# Altium PCB LimeSDR-Micro_mPCIe_1v4.PcbDoc (part 8 of 11)
Units mm, origin at the board's own origin, x right, y up, seen from the top; angles counter-clockwise.
Board outline 50.8 x 29.7 mm, 8 copper layers (Top, L2, L3, L4, L5, L6, L7, Bottom), stack 0.925 mm thick; 664 components, 386 nets, 2358 pads, 843 vias.
Unrouted connection lines stored in the file: 28.
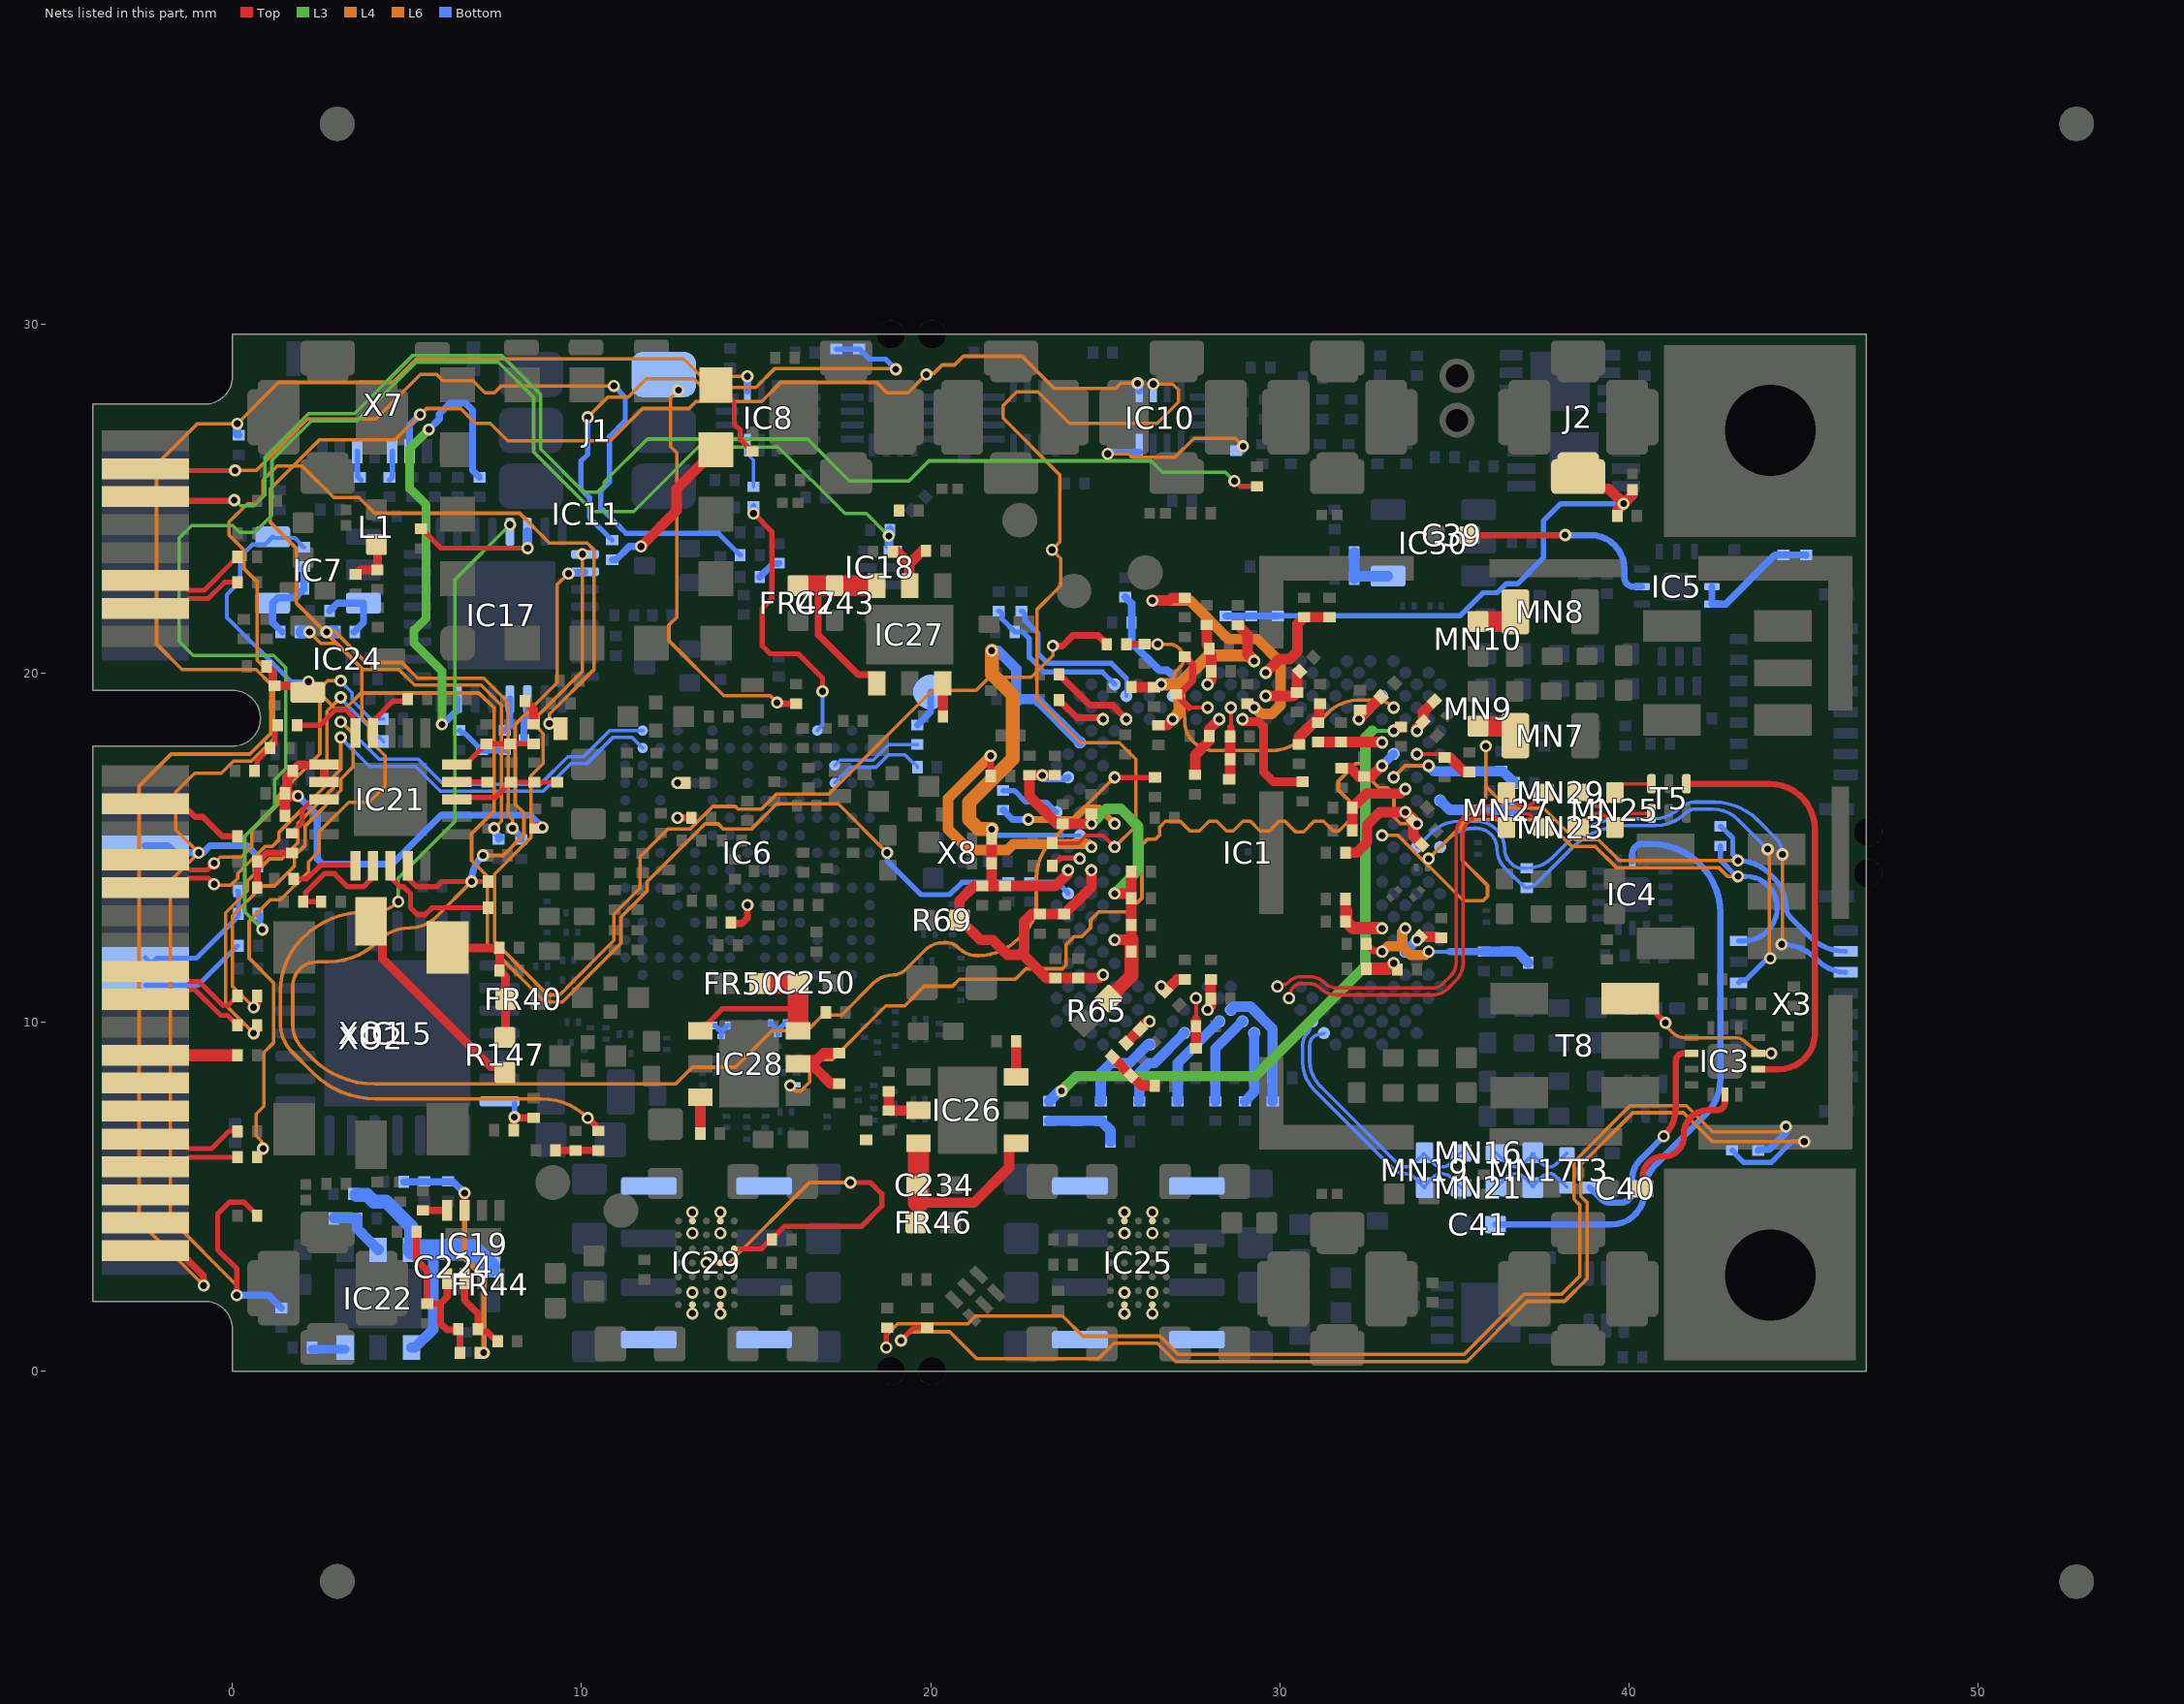
[diagram p12: the nets of this part, all layers, seen from the top]

## Via types
v1: diameter 0.35, hole 0.2, Top to Bottom, tented both sides, 684 vias
v2: diameter 0.35, hole 0.2, L5 to Bottom, tented both sides, 117 vias
v3: diameter 0.4, hole 0.2, Top to Bottom, tented both sides, 30 vias
v4: diameter 0.5, hole 0.2, Top to Bottom, tented both sides, 12 vias

## Nets (pads, with @x,y where several pads share a name; then routed paths per layer and width w, separated by ;. In a path a pad name is that pad's centre, name@x,y a point inside that pad or via, vN(x,y) a via of type N, cw(c..) or ccw(c..) an arc to the next point about the centre after c; other vN are vias at no path point) (continued)
LMS_TX1_BB_Q_P: IC1.R3 R14.1 | length 27.3
  L6 w0.1: v2(15.977,8.183) 16.135,8.025 16.279,8.025 16.534,8.28 16.534,8.739 16.72,8.925 17.179,8.925 18.714,10.46 19.251,10.46 19.525,10.734 ; 19.525,10.735 19.715,10.925 19.816,11.025 20.625,11.025 20.825,11.225 22.425,11.225 22.725,11.525 23.775,11.525 23.875,11.625 23.875,12.217 24.109,12.452 24.329,12.452 24.578,12.701 24.578,12.921 24.813,13.155 25.652,13.155 25.747,13.25 26.05,13.553 26.05,15.075 26.219,15.244 26.444,15.244 26.556,15.356 26.556,15.581 26.725,15.75 27.149,15.75 27.424,15.475 27.7,15.475 27.975,15.75 28.2,15.75 28.475,15.475 28.671,15.475 28.946,15.75 29.159,15.75 29.434,15.475 29.705,15.475 29.98,15.75 30.149,15.75 30.45,15.45 ; 30.45,15.45 30.68,15.45 30.98,15.75 31.25,15.75 31.525,15.475 31.692,15.475 32.159,15.941 32.159,16.166 31.675,16.65 31.675,16.9 32.175,17.4 32.4,17.4 32.575,17.225 32.575,16.975 32.84,16.71 33.09,16.71 33.271,16.529 33.271,15.876 33.461,15.686 33.921,15.686 v2(33.929,15.678)
LMS_TX2_BB_I_N: IC1.T6 R6.1 X3.3 | length 23.6
  L4 w0.1: v1(32.93,15.345) 33.389,15.345 35.259,13.475 35.825,13.475 35.95,13.6 35.95,13.915 35.225,14.64 35.225,15.75 35.9,16.425 v1(35.9,17.9)
  L6 w0.1: v1(35.9,17.9) 35.9,16.75 36.525,16.125 37.558,16.125 38.458,15.225 39.125,15.225 39.725,14.625 v2(43.125,14.625) v2@43.15,14.625
  Bottom w0.15: R6.1@42.625,15.605 42.7,15.53 42.712,15.53 42.975,15.267 42.975,15.2 42.975,14.813 43.125,14.663 v2(43.125,14.625) cw(c43.125,13.358) 44.021,14.254 44.182,14.093 cw(c43.414,13.325) 44.5,13.325 ccw(c44.983,13.325) 44.642,12.983 45.17,12.455 ccw(c46.207,13.492) X3.3@46.207,12.025
LMS_TX2_BB_I_P: IC1.V2 R6.2 X3.2 | length 14.4
  L6 w0.1: v2(34.262,14.679) 35.382,15.8 37.6,15.8 38.375,15.025 39.042,15.025 39.642,14.425 42.575,14.425 42.825,14.175 v2(43.125,14.175)
  Bottom w0.15: R6.2@42.625,15.045 42.625,14.63 43.08,14.175 v2(43.125,14.175) 43.35,14.175 cw(c43.35,13.275) 44.25,13.275 cw(c43.3,13.275) 43.3,12.325 X3.2@43.142,12.325
LMS_TX2_BB_Q_N: IC1.U1 R9.2 X3.6 | length 16
  L6 w0.1: v2@44.025,14.95 44.025,11.85 v2(44.05,11.825)
  Bottom w0.1: IC1.U1@34.595,15.012 34.82,15.237 cw(c35.575,14.482) 35.575,15.55 35.63,15.55 cw(c35.63,14.961) 36.046,15.378 36.049,15.374 cw(c35.625,14.95) 36.225,14.95 ccw(c36.97,14.95) 36.443,14.424 ccw(c36.97,14.95) 36.444,14.423 36.634,14.233 36.921,13.945 36.95,13.945 36.984,13.911 36.984,13.883 ccw(c37.075,13.974) 37.029,13.853 ccw(c37.068,14.323) 37.068,13.852 ccw(c37.068,14.253) 37.352,13.969 38.38,14.998 cw(c39.895,13.483) 38.4,15.017 cw(c39.895,13.483) 39.895,15.625 40.766,15.625 ccw(c40.766,16.809) 41.603,15.972 cw(c41.912,15.663) 41.912,16.1 42.4,16.1 cw(c42.4,15.074) 43.126,15.799 v2(43.975,14.95)
  Bottom w0.15: X3.6@43.142,11.125 43.217,11.2 43.35,11.2 43.922,11.772 cw(c44.05,11.644) v2(44.05,11.825)
LMS_TX2_BB_Q_P: IC1.U3 R9.1 X3.5 | length 17.3
  L6 w0.1: v2@44.4,12.225 v2(44.4,14.8)
  Bottom w0.1: IC1.U3@33.929,15.012 34.325,15.408 cw(c35.15,14.583) 35.15,15.75 35.641,15.75 cw(c35.641,14.95) 36.441,14.95 ccw(c36.964,14.95) 36.595,14.58 36.65,14.525 ccw(c36.94,14.815) 36.94,14.405 R9.1@37.075,14.405 ccw(c37.075,15.443) 37.809,14.709 38.298,15.198 cw(c39.812,13.683) 39.812,15.825 40.726,15.825 ccw(c40.726,16.849) 41.45,16.125 cw(c41.872,15.703) 41.872,16.3 42.436,16.3 cw(c42.436,14.516) 43.697,15.778 44.234,15.241 cw(c43.892,14.9) v2@44.375,14.9
  Bottom w0.15: v2(44.376,12.225) cw(c44.376,10.84) 45.356,11.819 45.427,11.748 ccw(c46.207,12.529) X3.5@46.207,11.425
LMS_TXEN: IC1.U29 IC10.10 R11.1 | length 24.9
  Top w0.11: R11.1@23.48,15.15 R11.1@23.48,15.125 24.225,15.125 24.448,15.348 24.934,15.348 v1(25.27,15.012)
  L4 w0.1: v1(23.475,23.525) 23.725,23.275 23.725,22.5 23.05,21.825 23.05,19.25 24.299,18.001 25.405,18.001 25.875,17.531 25.875,15.617 v1(25.27,15.012)
  L6 w0.1: v1(23.475,23.525) 23.7,23.75 23.7,25.675 22.075,27.3 22.075,27.66 22.465,28.05 23.075,28.05 23.975,27.15 26.485,27.15 27.1,27.765 27.1,28.109 26.934,28.275 v2(26.375,28.275)
LMS_TxPLL_CLK: C196.2 IC1.E5 R149.2 | length 10.9
  Top w0.2: R149.2@25.57,20.825 v1(26.505,20.825)
  L6 w0.1: v1@26.53,20.825 26.825,20.825 cw(c26.825,20.4) 27.034,20.77 cw(c26.825,20.4) 27.25,20.4 cw(c26.948,20.4) 27.162,20.187 27.063,20.088 ccw(c27.35,19.8) 26.943,19.8 26.943,19.503 ccw(c27.478,19.503) 27.1,19.125 cw(c26.678,18.703) 27.275,18.703 27.275,18.625 ccw(c28.125,18.625) 28.125,17.775 29.75,17.775 ccw(c29.75,19.103) 30.689,18.164 31.396,18.871 cw(c32.25,18.018) 31.561,19.009 cw(c32.25,18.018) 32.25,19.225 32.739,19.225 cw(c32.739,18.484) v1(33.263,19.008)
LNA2_EN: IC10.9 R144.1 X7.6 | length 52.3
  L4 w0.1: v1(0.875,6.375) 0.828,6.422 0.828,6.588 0.675,6.74 0.675,7.365 0.9,7.59 0.9,9.13 1.173,9.403 1.173,11.132 0.475,11.83 0.475,12.888 1.087,13.5 1.375,13.5 2.175,14.3 2.175,14.588 2.475,14.888 2.475,15.444 3.328,16.297 3.912,16.297 4.375,16.759 4.375,17.626 3.9,18.101 3.9,18.525 3.7,18.725 3.7,20.134 1.825,22.009 1.825,23.575 1.075,24.325 1.075,25.267 2.483,26.675 4.65,26.675 v1(5.375,27.4) 5.384,27.4 5.559,27.575 6.535,27.575 6.96,27.15 7.385,27.15 7.885,26.65 10.817,26.65 11.742,27.575 13.075,27.575 13.275,27.775 15.158,27.775 15.708,28.325 18.45,28.325 18.75,28.025 19.35,28.025 v1(19.875,28.55)
  L6 w0.1: v1(19.875,28.55) 19.914,28.589 20.096,28.589 20.333,28.825 20.681,28.825 20.931,29.075 22.615,29.075 23.54,28.15 25.3,28.15 25.45,28.3 v2(25.925,28.3)
  Bottom w0.2: X7.6@5.075,26.35 5.075,27.1 v1(5.375,27.4) ; v2(25.925,28.3) 25.973,28.252 25.975,28.252 IC10.9@25.975,28.075
LNA2_EN_LS: IC10.4 R131.2 | length 5.2
  L6 w0.1: v2(25.075,26.275) 25.675,26.275 25.775,26.175 26.992,26.175 27.542,26.725 28.72,26.725 v2(28.95,26.495)
  Bottom w0.2: v2(25.075,26.275) 25.116,26.275 25.166,26.325 IC10.4@25.975,26.325
MCP_RESET: C178.1 IC15.14 R130.2 | length 1.3
  Top w0.2: R130.2@8.028,6.927 R130.2@8.055,6.9 ; v1@8.03,7.255 C178.1@8.625,7.255 ; R130.2@8.053,6.927 v1@8.053,7.198
  Bottom w0.15: v1@8.075,7.255 IC15.14@8.075,7.675
  other v1: 8.075,7.275
NetC7_2: C7.2 IC1.C29 R20.1 | length 4.6
  Bottom w0.15: R20.1@21.95,21.77 21.975,21.77 22.05,21.695 22.05,21.542 22.405,21.187 C7.2@22.405,21.175 22.63,21.175 22.825,20.98 22.825,20.45 23.25,20.025 24.92,20.025 IC1.C29@25.27,19.674
NetC39_2: C39.2 IC5.2 | length 5.9
  Top w0.18: C39.2@35.425,23.95 v1(38.175,23.95)
  Bottom w0.18: v1(38.175,23.95) 38.897,23.95 cw(c38.897,22.972) 39.875,22.972 39.875,22.725 ccw(c40.125,22.725) 40.125,22.475 IC5.2@40.375,22.475
NetC40_2: C40.2 IC3.13 | length 4.2
  Top w0.18: C40.2@40.4,5.225 40.4,5.575 cw(c40.975,5.575) 40.975,6.15 41,6.15 ccw(c41,6.725) 41.575,6.725 41.575,6.787 cw(c42.262,6.787) 42.262,7.475 42.538,7.475 ccw(c42.538,7.687) 42.75,7.687 IC3.13@42.75,7.922
NetC41_2: C41.2 IC4.13 | length 17.6
  Bottom w0.18: C41.2@36.177,4.2 39.5,4.2 ccw(c39.5,5.15) 40.392,4.822 ccw(c39.5,5.15) 40.45,5.15 cw(c41.536,5.15) 40.768,5.918 42.2,7.35 ccw(c41.176,8.375) 42.625,8.375 42.625,13.11 ccw(c40.635,13.11) 40.635,15.1 40.375,15.1 ccw(c40.375,14.825) 40.1,14.825 IC4.13@40.1,14.603
NetC43_1: C43.1 FR1.2 IC5.8 IC5.9 | length 3.8
  Bottom w0.2: IC5.8@42.375,22.475 IC5.9@42.375,21.975 42.775,21.975 44.18,23.38 C43.1@44.425,23.38 45.065,23.38 FR1.2@45.07,23.375
NetC50_1: C50.1 C51.1 C57.1 C58.1 C59.1 C60.1 C61.1 C62.1 IC1.AA29 IC1.AE29 IC1.L33 IC1.R31 R65.2 | length 13.2
  Top w0.3: C58.1@23.564,17.069 C57.1@22.83,17.069 22.83,16.468 23.62,15.678 v1(24.604,15.678) C50.1@24.604,15.97 ; v1(25.27,13.68) 25.747,13.68 C61.1@25.747,14.31 ; v1@25.299,12.338 25.294,12.338 25.28,12.352 25.28,12.358 25.747,12.358 C59.1@25.747,12.785 C62.1@25.747,13.54
  Top w0.4: R65.2@25.1,10.675 25.747,11.322 C60.1@25.747,12.015 25.747,12.358
  L3 w0.3: v1(24.604,15.678) 25.029,16.103 25.447,16.103 25.942,15.607 25.942,14.352 v1(25.27,13.68)
  Bottom w0.2: v1(23.197,17.065) 23.294,16.968 23.79,16.968 23.804,16.981 23.91,16.981 IC1.L33@23.938,17.01
  other v1: 25.27,12.348
NetC52_1: C52.1 C53.1 C54.1 FR6.1 IC1.A17 IC1.C25 IC1.F24 | length 6.8
  Top w0.3: FR6.1@25.752,19.595 C54.1@26.397,19.595 26.51,19.595 26.589,19.674 v1(26.602,19.674) ; C52.1@26.524,18.501 26.774,18.501 26.935,18.662 v1(26.935,18.675) ; C53.1@28.8,21.375 29.075,21.1 29.075,20.532 v1(29.266,20.34)
  L4 w0.35: v1(26.602,19.674) 27.125,19.674 ; v1(26.935,18.675) 27.125,18.865 27.125,19.674 ; v1(29.266,20.34) 29.107,20.5 27.951,20.5 27.125,19.674
NetC55_2: C55.2 FR5.1 IC1.M4 | length 2.4
  Top w0.3: C55.2@32.081,15.49 32.081,15.515 32.077,15.519 FR5.1@32.077,16.14 32.482,16.545 33.45,16.545 33.582,16.677 v1(33.596,16.677)
NetC56_1: C56.1 FR4.1 IC1.AL21 | length 0.9
  Top w0.3: v1(27.934,10.35) 27.934,10.364 28.026,10.456 C56.1@28.026,10.675 FR4.1@28.025,11.22 FR4.1@28.025,11.22
NetC63_1: C63.1 IC1.G5 R66.1 | length 18.3
  Top w0.3: v1(33.263,18.342) 33.276,18.342 33.389,18.455 C63.1@33.475,18.455
  L3 w0.11: 32.658,18.342 v1@33.182,18.342
  L3 w0.3: v1(23.75,8.025) 24.175,8.45 29.3,8.45 32.45,11.6 32.45,18.15 32.65,18.35
  Bottom w0.3: R66.1@23.4,7.731 23.694,8.025 v1(23.75,8.025)
NetC64_1: C64.1 FR9.1 FR51.1 IC1.P4 | length 3.6
  Top w0.3: FR51.1@31.88,14.85 32.2,14.85 32.5,15.15 32.5,15.65 32.861,16.011 v1(33.596,16.011) ; C64.1@33.824,15.742 33.824,15.33 FR9.1@34.077,15.077
  Top w0.35: v1(33.596,16.011) 33.824,15.782 C64.1@33.824,15.742
NetC65_1: C65.1 FR20.1 IC1.D6 IC1.F8 | length 1.8
  Top w0.3: v1(32.264,18.675) 32.264,18.681 FR20.1@32.899,19.317
  Bottom w0.3: v1(32.264,18.675) IC1.D6@32.93,19.341
NetC66_1: C66.1 FR19.1 IC1.B16 | length 2.9
  Top w0.3: v1(29.599,20.007) 29.992,20.4 30.288,20.4 30.509,20.621 30.509,21.404 C66.1@30.7,21.595 FR19.1@31.425,21.595
NetC67_1: C67.1 C68.1 FR18.1 IC1.E19 | length 2
  Top w0.11: 28.6,18.45 v1(28.6,19.008)
  Top w0.2: C67.1@28.6,18.155 28.6,18.18 28.6,18.45
  Top w0.3: FR18.1@28.575,17.055 28.575,17.628 C67.1@28.575,18.155
NetC69_2: C69.2 FR17.1 IC1.F20 | length 1.9
  Top w0.3: FR17.1@27.575,17.085 27.575,17.65 27.98,18.055 27.98,18.225 27.98,18.388 v1(28.267,18.675)
NetC70_1: C70.1 FR16.1 IC1.AJ25 | length 0.7
  Top w0.3: C70.1@26.724,10.888 27.056,11.22 FR16.1@27.275,11.22
  other v1: 26.602,11.016
NetC71_1: C71.1 IC1.AP26 R67.1 | length 2.5
  Bottom w0.3: R67.1@24.875,7.73 C71.1@24.875,8.4 24.875,8.539 25.161,8.825 25.696,8.825 26.212,9.341 26.26,9.341 IC1.AP26@26.269,9.351
NetC72_1: C72.1 FR14.1 IC1.AN23 | length 2.6
  Bottom w0.3: FR14.1@25.97,7.73 25.975,7.73 C72.1@25.975,8.4 25.975,8.539 26.261,8.825 26.409,8.825 IC1.AN23@27.268,9.684
NetC73_1: C73.1 FR13.1 IC1.AM20 | length 2.8
  Bottom w0.3: FR13.1@27.075,7.73 C73.1@27.075,8.4 27.075,8.825 IC1.AM20@28.267,10.017
NetC74_1: C74.1 FR12.1 IC1.AL19 | length 3.6
  Bottom w0.3: IC1.AL19@28.6,10.35 28.614,10.35 28.706,10.442 29.158,10.442 29.795,9.805 C74.1@29.795,8.4 FR12.1@29.795,7.73
NetC75_1: C75.1 FR11.1 IC1.AG5 | length 0.8
  Top w0.35: FR11.1@32.53,11.525 33.105,11.525 v1(33.263,11.682)
NetC76_2: C76.2 FR10.1 IC1.AD6 | length 2.1
  Top w0.3: FR10.1@31.88,12.875 C76.2@31.88,13.525
  Top w0.35: 31.905,13.2 31.905,12.875 32.09,12.69 32.921,12.69 v1(32.93,12.681)
NetC77_1: C77.1 FR8.1 IC1.J3 | length 1.6
  Top w0.11: v1(33.929,17.676) 34.629,17.676 C77.1@34.63,17.675
  Top w0.3: C77.1@34.725,17.58 34.87,17.58 35.285,17.165 FR8.1@35.428,17.165
NetC78_2: C78.2 FR7.1 IC1.J5 IC1.K6 | length 1.9
  Top w0.3: FR7.1@31.772,17.27 32.03,17.27 32.265,17.035 C78.2@32.422,17.035 32.621,17.035 v1(32.93,17.343)
  Bottom w0.25: v1(32.93,17.343) IC1.J5@33.263,17.676
NetC79_2: C79.2 FR15.1 R66.2 R67.2 | length 2.2
  Bottom w0.3: R66.2@23.4,7.171 R66.2@23.425,7.171 ; R66.2@23.426,7.17 C79.2@24.175,7.17 R67.2@24.875,7.17 24.9,7.17 24.9,7.145 25.145,6.9 FR15.1@25.145,6.575
NetC80_1: C80.1 FR21.1 IC1.K2 IC1.L5 | length 3.8
  L4 w0.11: v1(33.263,17.01) 33.596,17.343 v1(34.262,17.343)
  Bottom w0.3: v1(34.262,17.343) 34.422,17.183 36.387,17.183 FR21.1@36.725,16.845
NetC81_1: C81.1 C82.1 FR24.1 IC1.C21 | length 1.8
  Top w0.3: FR24.1@27.909,21.375 27.909,20.8 27.984,20.725 C82.1@27.984,20.7 27.984,20.587 28.034,20.537 C81.1@28.034,20.05 28.034,19.788 27.934,19.688 v1(27.934,19.674)
NetC83_1: C83.1 C84.1 C85.1 FR23.1 IC1.AD4 IC1.AF2 IC1.AF6 | length 5.7
  Top w0.2: C83.1@32.477,12.24 32.477,12.215 32.527,12.165 32.552,12.165 32.68,12.037 32.907,12.037 v1(32.93,12.015) ; v1@34.233,11.986 v1(34.262,12.015)
  L4 w0.3: v1(32.93,12.015) 32.943,12.015 33.1,12.172 33.504,12.172 ; v1(33.596,12.681) 33.596,12.667 33.504,12.575 33.504,12.172 ; v1(34.262,12.015) 34.248,12.015 34.156,11.923 33.752,11.923 33.504,12.172
  Bottom w0.11: v1(34.262,12.015) 34.866,12.015
  Bottom w0.2: 34.866,12.015 C84.1@35.845,12.015
  Bottom w0.3: C84.1@35.845,12.015 C85.1@36.495,12.015 36.805,12.015 FR23.1@37.12,11.7
NetC86_1: C86.1 FR22.1 IC1.AN17 | length 2.1
  Bottom w0.3: FR22.1@29,7.73 29.266,7.996 C86.1@29.266,8.4 IC1.AN17@29.266,9.684
NetC87_1: C87.1 IC1.D24 R68.1 | length 3.5
  Bottom w0.11: IC1.D24@26.935,19.341 26.935,19.915
  Bottom w0.22: R68.1@25.575,22.17 25.755,21.99 C87.1@25.755,21.45 25.755,20.87 26.55,20.075 26.775,20.075 26.935,19.915
NetC88_1: C88.1 C89.1 C90.1 C91.1 C92.1 C93.1 C94.1 C95.1 C96.1 C97.1 IC1.AH30 IC1.H32 IC1.T32 IC1.W31 IC1.W33 R69.2 | length 27.5
  Top w0.3: R69.2@20.825,12.925 R69.2@20.825,12.95 ; v1@21.746,15.525 C92.1@21.746,15.258 C93.1@21.746,14.541 21.746,13.9 ; v1(23.938,14.346) 23.929,14.336 23.929,14.245 23.584,13.9 C94.1@22.13,13.9 21.746,13.9 ; v1(24.604,14.346) 24.604,13.87 C88.1@23.825,13.091 C89.1@23.125,13.091 22.891,13.091 22.675,12.875 22.675,12.05 22.55,11.925 ; v1(24.937,11.349) 24.924,11.349 24.832,11.257 C97.1@24.225,11.257 C96.1@23.575,11.257 23.318,11.257 22.65,11.925 22.55,11.925 ; R69.2@20.825,12.95 21.426,12.349 21.776,12.349 22.2,11.925 22.55,11.925 ; R69.2@20.825,12.95 20.825,13.475 21.25,13.9 C95.1@21.475,13.9 21.746,13.9
  L4 w0.4: v1(21.75,15.525) 21.375,15.525 21.1,15.8 21.1,16.297 22.35,17.547 22.35,19.375 21.75,19.975 v1(21.75,20.639)
  Bottom w0.11: 23.767,15.345 IC1.T32@24.271,15.345
  Bottom w0.15: v1(21.75,15.525) 21.93,15.345 23.767,15.345
  Bottom w0.3: v1(21.75,20.639) 21.93,20.639 22.45,20.119 C91.1@22.45,20 C90.1@22.45,19.25 23.031,19.25 IC1.H32@24.271,18.009
NetC98_1: C98.1 FR25.1 IC1.G3 | length 1.1
  Top w0.3: v1(33.929,18.342) 33.938,18.352 33.938,18.434 34.12,18.616 34.106,18.629 34.106,18.877 FR25.1@34.427,19.198
NetC99_1: C99.1 FR32.1 IC1.E21 | length 2.5
  Top w0.11: 27.404,19.008 v1(27.934,19.008)
  Top w0.2: FR32.1@27.275,20.47 27.5,20.245 27.5,19.77 27.17,19.44 27.075,19.44 C99.1@27.025,19.39 27.05,19.39 27.1,19.34 27.1,19.312 27.404,19.008
  Top w0.25: v1@27.915,19.027 v1(27.934,19.008)
NetC100_1: C100.1 FR31.1 IC1.D16 | length 1.6
  Top w0.3: v1(29.599,19.341) 30.395,19.341 C100.1@30.495,19.441 30.495,19.975 FR31.1@30.57,20.05
NetC101_1: C101.1 FR30.1 IC1.E17 | length 7.8
  Top w0.3: v1(26.35,22.075) 26.825,22.075 26.905,22.155 FR30.1@27.275,22.155 ; C101.1@29.075,19.12 29.15,19.12 29.262,19.008 v1(29.266,19.008)
  L4 w0.3: v1(26.35,22.075) 27.425,22.075 28.525,20.975 29.35,20.975 30.025,20.3 30.025,19.075 29.775,18.825 29.463,18.825 29.28,19.008 v1(29.266,19.008)
NetC102_1: C102.1 FR29.1 IC1.AK22 | length 1.4
  Top w0.11: 27.601,10.124 v1(27.601,10.683)
  Top w0.2: C102.1@27.601,9.875 27.601,10.124
  Top w0.3: FR29.1@27.601,9.25 C102.1@27.601,9.875
NetC103_1: C103.1 FR28.1 IC1.AM18 | length 2.6
  Bottom w0.3: FR28.1@28.155,7.73 C103.1@28.155,8.4 28.155,9.239 IC1.AM18@28.933,10.017
NetC104_1: C104.1 FR27.2 IC1.AE3 IC1.AF4 | length 1.1
  Top w0.3: C104.1@34.021,12.446 34.039,12.428 34.05,12.44 34.487,12.44 34.512,12.415 FR27.2@34.625,12.415
  Bottom w0.3: IC1.AF4@33.596,12.015 v1(33.929,12.348)
NetC105_1: C105.1 FR26.2 IC1.N1 | length 2.3
  Bottom w0.3: IC1.N1@34.595,16.344 34.864,16.075 C105.1@36,16.075 FR26.2@36.745,16.075
NetC106_1: C106.1 FR34.1 IC1.AM26 | length 0.9
  Top w0.3: FR34.1@25.598,9.398 26.207,10.007 26.26,10.007 v1(26.269,10.017)
NetC107_1: C107.1 FR33.2 IC1.H6 | length 1.9
  Top w0.3: FR33.2@31.075,18.02 31.725,18.02 32.905,18.02 32.916,18.009 v1(32.93,18.009)
NetC108_1: C108.1 FR34.2 R71.2 | length 1.6
  Top w0.3: FR34.2@25.202,9.002 C108.1@25.74,8.465 26.029,8.175 R71.2@26.42,8.175
NetC109_1: C109.1 FR33.1 R70.1 | length 1.4
  Top w0.3: C109.1@30.55,17.955 30.55,18.175 31.125,18.75 31.125,19.12 R70.1@31.15,19.12
NetC124_1: C124.1 R82.1 | length 10.6
  L6 w0.1: v2(2.205,21.175) 2.53,20.85 2.992,20.85 3.742,20.1 4.767,20.1 5.217,19.65 7.117,19.65 7.7,19.067 7.7,15.75 v2(7.5,15.55)
  Bottom w0.2: v2(7.5,15.55) 7.5,15.455 7.675,15.28 R82.1@7.625,15.23
  Bottom w0.35: C124.1@1.98,21.175 v2(2.205,21.175)
NetC124_2: C124.2 IC7.4 R77.2 R78.2 | length 2.6
  Bottom w0.2: C124.2@1.42,21.175 1.15,21.445 IC7.4@1.15,22 1.305,22.155 1.775,22.155 1.97,22.35 1.995,22.35 2.045,22.4 R77.2@2.045,22.425 2.045,23.04 R78.2@2.05,23.045
NetC130_1: C130.1 R86.1 | length 10.3
  L6 w0.1: v2(2.695,21.175) 2.95,21.175 3.825,20.3 4.85,20.3 5.3,19.85 7.2,19.85 7.9,19.15 7.9,15.925 8.025,15.8 v2(8.025,15.55)
  Bottom w0.2: v2(8.025,15.55) 8.275,15.3 R86.1@8.275,15.23
  Bottom w0.35: v2(2.695,21.175) C130.1@2.92,21.175
NetC130_2: C130.2 IC7.3 R88.2 | length 2
  Bottom w0.2: R88.2@2.78,21.775 2.78,21.8 2.83,21.85 2.855,21.85 3.005,22 IC7.3@3.75,22 3.75,21.445 C130.2@3.48,21.175
NetC165_1: C165.1 L1.2 R108.1 | length 1.4
  Top w0.25: R108.1@3.525,22.83 3.55,22.83 3.675,22.955 C165.1@4.15,22.955 4.15,23.65 L1.2@4.125,23.675
NetC168_1: C168.1 FR36.1 R109.2 | length 15.6
  L4 w0.1: v1(10.175,27.325) 10.75,27.9 11.331,27.9 11.856,28.425 13.217,28.425 13.467,28.175 14.992,28.175 15.542,28.725 v1@19.075,28.725
  Bottom w0.15: v1(10.175,27.325) 10.175,26.263 9.975,26.063 9.975,25.275 10.225,25.025 10.225,24.455 FR36.1@10.875,23.805 ; C168.1@17.3,29.28 17.962,29.28 18.252,28.99 18.71,28.99 v1(19,28.7)
NetC184_1: C184.1 C185.1 R146.1 | length 1.2
  Top w0.2: C184.1@9.255,6.325 10.47,6.325 C185.1@10.475,6.32
NetC185_2: C185.2 IC17.13 | length 28.2
  Top w0.2: v1(10.175,7.25) 10.4,7.025 10.4,6.93 10.45,6.88 C185.2@10.475,6.88
  L3 w0.1: v1(4.75,13.45) 4.75,14.125 6.375,15.75 6.375,22.675 v1(7.95,24.25)
  L6 w0.1: v1(4.75,13.45) cw(c4.026,14.174) 4.026,13.15 3.802,13.15 ccw(c3.802,10.61) 2.006,12.406 1.993,12.393 ccw(c3.487,10.9) 1.375,10.9 1.375,9.935 ccw(c2.485,9.935) 1.7,9.15 2.306,8.544 ccw(c4.102,10.34) 4.102,7.8 8.847,7.8 cw(c8.847,5.922) v1(10.175,7.25)
NetC186_2: C186.2 IC17.14 | length 3.8
  Top w0.15: C186.2@5.4,24.13 5.425,24.13 5.5,24.055 5.5,24.042 5.967,23.575 v1(8.45,23.575)
  Bottom w0.25: v1(8.45,23.575) IC17.14@8.45,24.05
NetC191_1: C191.1 C192.1 R148.1 | length 1.5
  Bottom w0.15: C191.1@6.5,18.355 6.575,18.28 6.64,18.28 7.125,17.795 R148.1@7.15,17.795
  Bottom w0.2: R148.1@7.15,17.795 C192.1@7.8,17.795
NetC192_2: C192.2 IC17.28 | length 1
  Bottom w0.2: C192.2@7.8,18.355 7.825,18.355 7.875,18.405 7.875,18.447 7.95,18.522 IC17.28@7.95,19.25
NetC193_2: C193.2 IC17.27 | length 1.2
  Bottom w0.2: C193.2@8.345,18.075 8.345,18.57 8.45,18.675 IC17.27@8.45,19.25
NetC194_1: C194.1 C195.1 FR40.1 R147.2 XO1.5 XO2.4 | length 4.3
  Top w0.25: XO1.5@6.164,12.135 6.164,12.225 6.264,12.125 C194.1@7.65,12.125 7.65,11.48 C195.1@7.645,11.475 7.825,11.295 FR40.1@7.825,10.65 7.823,10.648 R147.2@7.823,9.547
NetC202_1: C202.1 IC19.7 R163.1 R164.1 R165.1 | length 7.3
  Top w0.2: IC19.7@6.65,4.6 v1(6.65,5.1)
  Top w0.3: R164.1@7.08,0.525 v1(7.2,0.525)
  L4 w0.15: v1(6.65,5.1) 6.65,3.225 7.2,2.675 v1(7.2,0.525)
  Bottom w0.2: R163.1@4.905,5.425 6.175,5.425 6.325,5.425 v1(6.65,5.1)
NetC205_1: C205.1 FR42.2 IC19.1 R159.1 R164.2 | length 5.2
  Top w0.2: FR42.2@5.275,3.995 5.275,3.18 5.575,2.88 C205.1@5.575,1.93 5.955,1.93 ; IC19.1@6.15,2.65 6.15,2.125 5.955,1.93 ; R164.2@6.52,0.525 6.52,1.125 6.47,1.175 R159.1@6.47,1.2 6.45,1.18 6.145,1.18 5.955,1.37 5.955,1.93
NetC207_2: C207.2 C208.2 C209.2 FR43.2 IC21.6 IC21.7 | length 12.5
  Top w0.25: C208.2@1.725,17.2 1.9,17.375 IC21.6@2.625,17.375 IC21.7@2.625,16.875
  Top w0.3: C209.2@1.505,15.9 C207.2@1.505,16.525 ; C208.2@1.725,17.175 1.565,17.015 1.565,16.723 1.505,16.663 C207.2@1.505,16.55 C207.2@1.505,16.525 ; v1(1.875,16.475) 1.865,16.485 1.57,16.485 1.53,16.525 C207.2@1.505,16.525 ; FR43.2@8.675,15.545 8.7,15.545 FR43.2@8.7,15.586
  Bottom w0.2: v1(1.875,16.475) 2.425,15.925 2.425,14.675 2.575,14.525 4.575,14.525 5.975,15.925 8.525,15.925 v1@8.775,15.675 ; v1@8.775,15.689 v1@8.775,15.675 ; v1@8.825,15.625 v1@8.775,15.675
  other v1: 8.875,15.575
NetC211_1: C211.1 C212.2 R166.1 | length 1.5
  Top w0.15: C212.2@0.705,17.2 0.705,17.485 R166.1@1.07,17.85 1.22,18 1.22,18.4 1.295,18.475 C211.1@1.295,18.5
NetC211_2: C211.2 IC21.5 | length 2.4
  Top w0.15: C211.2@1.855,18.5 2.505,18.5 2.955,18.95 3.25,18.95 3.45,18.75 3.45,18.35 IC21.5@3.525,18.275 IC21.5@3.475,18.225
NetC215_1: C215.1 C216.2 IC21.18 R168.1 | length 3.1
  Top w0.15: IC21.18@6.425,16.375 6.48,16.43 7.535,16.43 7.875,16.77 7.875,16.795 7.95,16.87 C215.1@7.975,16.87 C216.2@8.65,16.87 R168.1@9.3,16.87
NetC217_1: C217.1 IC21.8 | length 1.6
  Top w0.15: C217.1@1.7,15.405 1.725,15.405 1.8,15.48 1.8,15.505 2,15.705 2,16.075 2.3,16.375 IC21.8@2.625,16.375
NetC217_2: C217.2 C218.1 R174.2 | length 1.8
  Top w0.2: C218.1@0.705,13.85 0.705,14.575 0.975,14.845 C217.2@1.7,14.845
NetC219_2: C219.2 IC21.4 | length 1.6
  Top w0.15: IC21.4@4.025,18.275 4.025,18.625 4.6,19.2 C219.2@5.02,19.2
NetC221_1: C221.1 R179.1 | length 0.8
  Top w0.25: R179.1@8.38,19.2 8.625,18.955 8.625,18.555 8.65,18.53 C221.1@8.67,18.53
NetC221_2: C221.2 C222.2 IC21.20 R173.2 | length 2.5
  Top w0.15: IC21.20@6.425,17.375 6.673,17.375 R173.2@7.284,17.986 ; R173.2@7.3,17.97 7.975,17.97 C221.2@8.65,17.97
NetC223_1: C223.1 IC21.12 R180.1 | length 3.6
  Top w0.15: R180.1@2.54,13.45 2.099,13.45 C223.1@2.025,13.45 2.099,13.524 2.099,13.719 2.63,14.25 2.925,14.25 3.3,13.875 3.747,13.875 3.95,14.078 3.95,14.125 4.025,14.2 IC21.12@4.025,14.475
NetC224_2: C224.2 FR44.2 IC22.1 IC22.6 R187.1 | length 8
  Bottom w0.3: IC22.6@5.025,3.575 IC22.6@5.125,3.475 ; IC22.1@5.125,0.675 5.229,0.675 5.75,1.196 5.75,3.225
  Bottom w0.4: R187.1@3.55,5.05 3.85,5.05 4.05,4.85 4.403,4.85 5.125,4.128 IC22.6@5.125,3.475
  Bottom w0.6: IC22.6@5.175,3.475 C224.2@6.325,3.475 6.875,3.475 FR44.2@7.375,2.975
NetC230_2: C230.2 IC22.3 | length 0.9
  Bottom w0.25: C230.2@2.28,0.625 IC22.3@3.225,0.625
NetC234_2: C234.2 FR46.2 IC26.1 IC26.6 R194.1 | length 5.4
  Top w0.3: 19.65,4.825 21.241,4.825 22.25,5.834 22.25,6.325 IC26.1@22.45,6.525
  Top w0.6: 19.65,4.825 IC26.6@19.65,6.45
NetC239_2: C239.2 IC26.3 | length 0.9
  Top w0.3: IC26.3@22.45,8.425 C239.2@22.45,9.37
NetC243_2: C243.2 FR47.2 IC27.1 IC27.6 R200.1 | length 6
  Top w0.2: 16.775,22.5 16.775,21.1 17.925,19.95 18.45,19.95 IC27.1@18.45,19.7
  Top w0.6: FR47.2@16.2,22.5 16.775,22.5 C243.2@17.25,22.5 IC27.6@18.4,22.5
NetC245_2: C245.2 IC27.3 | length 0.9
  Top w0.3: C245.2@20.35,18.755 IC27.3@20.35,19.7
NetC250_2: C250.2 FR50.2 IC28.1 IC28.6 R210.1 | length 5.1
  Top w0.15: IC28.1@13.4,9.75 14.025,10.375 16.05,10.375
  Top w0.6: FR50.2@15.1,11.1 C250.2@16.175,11.1 ; IC28.6@16.2,9.825 C250.2@16.2,10.95
NetC256_2: C256.2 IC28.3 | length 0.9
  Top w0.3: C256.2@13.4,6.905 IC28.3@13.4,7.85
NetESD5_1: ESD5.1 J2.1 R229.2 R230.2 R231.2 R232.2 | length 15.9
  Top w0.3: J2.1@38.55,25.725 39,25.275 39.425,25.275 v1(39.85,24.85) ; R229.2@39.67,24.5 39.67,24.656 39.85,24.836 v1(39.85,24.85) ; ESD5.1@40.1,25.25 40.1,25.1 v1(39.85,24.85)
  Bottom w0.15: R232.2@29.95,21.636 29.952,21.634 35.159,21.634 35.825,22.3 36.229,22.3 36.484,22.555 36.805,22.555 37.55,23.3 37.55,24.35 38.05,24.85 v1(39.85,24.85)
  Bottom w0.2: R230.2@28.45,21.63 R232.2@29.95,21.63
NetFR35_2: FR35.2 IC11.9 | length 2.4
  Top w0.15: IC11.9@13.85,28.25 14.375,27.725 14.375,27.122 14.55,26.947 14.55,26.683 14.8,26.433 14.8,26.42 14.875,26.345 FR35.2@14.9,26.345
NetFR36_2: FR36.2 IC11.10 | length 4.6
  Top w0.3: v1(11.7,23.625) 12.725,24.65 12.725,25.275 IC11.10@13.85,26.4
  Bottom w0.2: FR36.2@10.875,23.245 10.99,23.245 11.37,23.625 v1(11.7,23.625)
NetIC1_AA33: IC1.AA33 R7.2 | length 1.2
  Bottom w0.15: R7.2@22.85,14 23.636,14 23.938,13.697 IC1.AA33@23.938,13.68
NetIC1_D28: IC1.D28 R23.1 | length 4.8
  Bottom w0.11: IC1.D28@25.603,19.341 25.603,19.845
  Bottom w0.15: R23.1@22.6,21.77 22.625,21.77 22.7,21.695 22.7,21.505 23.075,21.13 23.075,20.554 23.354,20.275 25.171,20.275 25.371,20.075 25.374,20.075 25.603,19.845
NetIC1_F18: IC1.F18 R35.1 | length 3.2
  Top w0.25: v1(28.933,18.675) 28.961,18.675 29.028,18.608 29.389,18.608 29.535,18.462 29.535,17.165 29.82,16.88 R35.1@30.65,16.88
NetIC1_F28: IC1.F28 R22.1 | length 2.5
  Top w0.2: R22.1@23.68,19.957 24.562,19.075 25.204,19.075 v1(25.603,18.675)
NetIC1_F30: IC1.F30 R21.1 | length 1.5
  Top w0.2: R21.1@23.68,19.225 23.68,19.2 23.73,19.15 23.755,19.15 24.188,18.717 24.855,18.717 24.897,18.675 v1(24.937,18.675)
NetIC1_P34: IC1.P34 R24.1 | length 1.8
  Bottom w0.15: R24.1@22.075,16.63 22.395,16.63 22.725,16.3 23.317,16.3 IC1.P34@23.605,16.011
NetIC1_R29: IC1.R29 R24.2 | length 3.6
  L4 w0.2: v1(22.8,15.8) 24.1,15.8 24.425,16.125 24.824,16.125 v1(25.27,15.678)
  Bottom w0.2: R24.2@22.075,16.07 22.1,16.07 22.15,16.02 22.15,15.995 22.345,15.8 v1(22.8,15.8)
NetIC1_U31: IC1.U31 R25.2 | length 7.7
  Top w0.15: v1@24.587,15.029 v1(24.604,15.012)
  Top w0.2: R25.2@21.72,17.05 v1(21.72,17.625)
  L4 w0.3: v1(21.72,17.625) 20.5,16.405 20.5,15.525 21.1,14.925 22.2,14.925 22.375,15.1 24.091,15.1 24.095,15.104 24.448,15.104 24.452,15.1 24.517,15.1 v1(24.604,15.012)
NetIC1_V32: IC1.V32 R8.2 | length 0.9
  Top w0.15: R8.2@23.48,14.475 23.48,14.5 23.555,14.575 23.58,14.575 23.701,14.696 24.083,14.696 24.1,14.679 v1(24.271,14.679) v1@24.254,14.696
NetIC6_E8: IC6.E8 R99.1 | length 0.9
  Top w0.2: R99.1@14.28,12.85 14.305,12.825 14.6,12.825 14.751,12.976 v1(14.751,13.35)
NetIC6_K4: IC6.K4 R81.1 | length 0.4
  Top w0.2: v1(12.751,15.85) R81.1@13.145,15.85
NetIC6_M4: IC6.M4 R80.1 | length 0.2
  Top w0.35: v1(12.751,16.85) R80.1@12.946,16.85
NetIC6_M13: IC6.M13 R87.1 | length 2.9
  Bottom w0.1: IC6.M13@17.251,16.85 17.701,17.3 18.433,17.3 18.783,17.65 19.27,17.65 19.495,17.425 19.52,17.425 19.62,17.325 R87.1@19.62,17.3
NetIC6_N13: IC6.N13 R79.2 | length 2.6
  Bottom w0.1: IC6.N13@17.251,17.35 17.26,17.35 17.41,17.5 18.35,17.5 18.8,17.95 R79.2@19.62,17.95
NetIC6_R12: IC6.R12 R76.2 | length 8
  Top w0.15: v1(14.925,24.57) 15.455,24.04 15.455,22.13 15.175,21.85 15.175,20.779 15.404,20.55 16.206,20.55 16.901,19.855 v1(16.901,19.475)
  Bottom w0.1: IC6.R12@16.751,18.35 16.901,18.5 v1(16.901,19.475)
  Bottom w0.15: v1(14.925,24.57) R76.2@14.925,24.77 R76.2@14.925,24.795
NetIC7_5: IC7.5 R78.1 R84.2 R85.1 | length 40.5
  L6 w0.1: v2(2.175,19.75) 2.95,18.975 3.235,18.975 3.685,19.425 7.059,19.425 7.5,18.984 7.5,16.05 6.85,15.4 6.85,14.625 7.305,14.17 7.305,12.22 8.95,10.575 9.452,10.575 9.76,10.883 9.76,10.885 11.125,12.25 11.125,13 11.875,13.75 11.875,14.014 13.536,15.675 13.916,15.675 14.066,15.525 14.86,15.525 15.585,16.25 17.35,16.25 v2(18.75,14.85)
  Bottom w0.12: R78.1@2.05,23.605 2.025,23.605 1.95,23.68 1.95,23.705 1.787,23.868 1.182,23.868 IC7.5@1.15,23.9 0.933,23.683 0.575,23.683 0.231,23.339 0.223,23.339 0.223,22.625 -0.16,22.242 -0.16,21.588 1.678,19.75 v2@2.075,19.75
  Bottom w0.15: v2(18.75,14.85) 18.75,14.625 19.725,13.65 20.545,13.65 20.895,14 R84.2@22.328,14
NetIC17_17: IC17.17 R149.1 | length 36
  Top w0.2: v1(23.5,20.775) 23.775,20.775 24.075,21.075 24.795,21.075 R149.1@25.045,20.825
  L6 w0.1: v2(10.025,23.4) 10.025,20.05 8.75,18.775 8.75,18.415 8.896,18.269 8.896,17.404 8.55,17.058 8.55,15.287 7.505,14.242 7.505,12.303 9.033,10.775 9.37,10.775 9.56,10.965 9.56,10.968 10.925,12.333 10.925,13.083 11.675,13.833 11.675,14.734 12.466,15.525 13.103,15.525 13.753,16.175 14.401,16.175 14.476,16.1 15.152,16.1 15.577,16.525 17.075,16.525 20.05,19.5 21.3,19.5 21.675,19.875 22.875,19.875 23.5,20.5 v1(23.5,20.775)
NetIC17_18: IC17.18 R150.1 | length 48.6
  Top w0.15: v1@25.27,17.005 R150.1@26.425,17.005
  L6 w0.1: 2.021,9.222 cw(c2.736,9.936) 1.725,9.936 1.725,11.025 cw(c2.425,11.025) 2.425,11.725 2.746,11.725 ccw(c2.746,13.726) 4.16,12.31 ; 2.021,9.221 2.273,8.969 ccw(c4.069,10.765) 4.069,8.225 12.692,8.225 13.175,8.708 14.408,8.708 15.45,9.75 16.458,9.75 16.908,10.2 17.45,10.2 18.37,11.12 cw(c18.925,10.565) 18.925,11.35 ccw(c18.925,11.833) 19.266,11.491 19.82,12.045 cw(c20.375,11.49) 20.375,12.275 20.438,12.275 cw(c20.438,11.763) 20.8,12.125 ccw(c21.343,12.668) 21.343,11.9 21.35,11.9 ccw(c21.35,13.53) 22.226,12.156 ccw(c21.35,13.53) 22.502,12.377 22.694,12.569 ccw(c21.895,13.368) 23.025,13.368 23.025,14.1 cw(c24.629,14.1) 23.495,15.234 v1(25.27,17.01) ; 4.161,12.311 cw(c5.1,11.372) 5.1,12.7 ccw(c5.1,13.726) 5.826,13.001 v2(6.85,14.025) ; v2(7.175,14.775) 7.755,14.775 8.35,15.37 8.35,15.991 8.1,16.241 8.1,18.525 9.3,19.725 9.3,22.535 9.615,22.85 v1(9.625,22.85)
  Bottom w0.2: v2(6.85,14.025) cw(c7.876,14.025) 7.151,14.751 v2(7.175,14.775) ; v1(9.625,22.85) 9.65,22.875 10.075,22.875 IC17.18@10.1,22.9
NetIC17_31: IC17.31 R152.2 | length 14
  L3 w0.25: v1(5.625,26.975) 5.075,26.425 5.075,25.291 5.55,24.816 5.55,21.575 5.2,21.225 5.2,20.85 6,20.05 v1(6,18.525)
  Bottom w0.2: v1(5.625,26.975) 5.925,27.275 5.925,27.425 6.225,27.725 6.675,27.725 6.875,27.525 6.875,25.805 R152.2@7.075,25.605 ; v1@6.025,18.525 6.425,18.925 6.425,19.225 IC17.31@6.45,19.25
NetIC19_2: IC19.2 R158.2 R159.2 | length 2.3
  Top w0.2: IC19.2@6.65,2.65 6.65,2.025 7.03,1.645 R159.2@7.03,1.2 7.03,1.175 7.08,1.125 7.295,1.125 7.545,0.875 R158.2@7.545,0.85
NetIC19_8: IC19.8 R156.1 | length 0.7
  Top w0.2: R156.1@5.455,4.605 6.145,4.605 IC19.8@6.15,4.6
NetIC21_11: IC21.11 R170.2 | length 2
  Top w0.15: R170.2@1.755,14.1 2.125,14.1 2.525,14.5 3.55,14.5 IC21.11@3.525,14.475
NetIC21_13: IC21.13 R182.1 | length 3.9
  Top w0.15: IC21.13@4.525,14.475 4.525,14.153 4.803,13.875 4.9,13.875 5.1,13.675 5.1,13.275 5.3,13.075 5.52,13.075 5.72,13.275 R182.1@7.32,13.275
NetIC21_14: IC21.14 R183.1 | length 2.8
  Top w0.15: IC21.14@5.025,14.475 5.072,14.428 5.072,14.078 5.275,13.875 5.85,13.875 6,14.025 R183.1@7.32,14.025
NetIC21_19: IC21.19 R178.1 | length 0.9
  Top w0.15: IC21.19@6.425,16.875 7.295,16.875 R178.1@7.3,16.87
NetIC22_5: IC22.5 R189.2 R192.1 | length 1.9
  Bottom w0.3: R189.2@2.904,4.392 3.577,4.392 3.577,4.075 3.579,4.075 3.725,3.929 3.725,3.925 IC22.5@4.175,3.475 IC22.5@4.185,3.485
NetIC24_2: IC24.2 R191.2 R193.1 | length 1.7
  Top w0.25: R191.2@0.975,20.187 1.15,20.012 1.15,19.655 1.175,19.63 R193.1@1.2,19.63 1.77,19.63 1.95,19.45 IC24.2@2.15,19.45
NetIC25_A2: IC25.A2 IC25.B2 L3.1
  other v1: 26.35,1.65 26.35,2.25
NetIC25_A4: IC25.A4 IC25.B4 L2.1
  other v1: 25.55,1.65 25.55,2.25
NetIC25_F2: IC25.F2 IC25.G2 L5.1
  other v1: 26.35,3.95 26.35,4.55
NetIC25_F4: IC25.F4 IC25.G4 L4.1
  other v1: 25.55,3.95 25.55,4.55
NetIC26_5: IC26.5 R195.2 R196.1 | length 1.4
  Top w0.3: R195.2@18.8,8.015 R196.1@18.8,7.465 IC26.5@19.64,7.465 ; IC26.5@19.64,7.465 IC26.5@19.65,7.475
NetIC27_5: IC27.5 R207.2 R209.1 | length 1.9
  Top w0.3: R209.1@18.915,23.5 19.015,23.5 19.39,23.124 ; IC27.5@19.4,22.5 19.39,22.51 19.39,23.124 ; R207.2@19.865,23.525 19.791,23.525 19.39,23.124
NetIC28_5: IC28.5 R211.2 R212.1 | length 2.7
  Top w0.3: R211.2@17.375,8.235 17.14,8.235 16.675,8.7 16.4,8.7 16.3,8.8 IC28.5@16.2,8.8 16.3,8.9 16.728,8.9 16.938,9.11 R212.1@17.375,9.11
NetIC29_A2: IC29.A2 IC29.B2 L7.1
  other v1: 13.175,3.95 13.175,4.55
NetIC29_A4: IC29.A4 IC29.B4 L6.1
  other v1: 13.975,3.95 13.975,4.55
NetIC29_C5: IC29.C5 IC29.D3 IC29.D4 R213.2 | length 11.6
  Top w0.15: v1(13.575,3.1) IC29.D4@13.975,3.1 ; IC29.C5@14.375,3.5 15.15,3.5 15.325,3.675 15.375,3.675 15.45,3.75 R213.2@15.45,3.775 15.45,3.8 15.525,3.875 15.538,3.875 15.813,4.15 18.021,4.15 18.6,4.729 18.6,5.075 18.272,5.403 v1(17.703,5.403)
  L6 w0.1: v1(13.575,3.1) 14.225,3.1 16.528,5.403 v1(17.703,5.403)
NetIC29_F2: IC29.F2 IC29.G2 L9.1
  other v1: 13.175,1.65 13.175,2.25
NetIC29_F4: IC29.F4 IC29.G4 L8.1
  other v1: 13.975,1.65 13.975,2.25
NetIC30_4: IC30.4 R216.2 R217.1 | length 1.7
  Bottom w0.3: R217.1@32.13,22.7 R217.1@32.13,22.725 ; R216.2@32.13,23.45 R217.1@32.13,22.725 ; IC30.4@33.1,22.775 32.205,22.775 32.155,22.725 R217.1@32.13,22.725
NetJ1_6: J1.6 R90.1 | length 11.8
  Top w0.2: v1(15.6,19.15) 15.641,19.15 15.671,19.12 R90.1@16.15,19.12
  L6 w0.1: v1(12.775,28.1) 12.55,27.875 12.55,26.483 12.725,26.308 12.725,21.6 12.5,21.375 12.5,20.925 14.075,19.35 15.4,19.35 v1(15.6,19.15)
NetLED1_K: LED1.K R137.1 | length 34
  Top w0.15: v1(18.725,0.675) LED1.K@18.725,1.195
  L3 w0.1: v1(18.725,0.675) v1@18.738,0.688
  L6 w0.1: v1(18.725,0.675) 18.725,1.025 19.05,1.35 21.058,1.35 21.283,1.575 23.783,1.575 24.358,1 26.575,1 27.1,0.475 35.275,0.475 37,2.2 38.075,2.2 38.6,2.725 38.6,4.75 38.425,4.925 38.425,5.992 40.033,7.6 41.65,7.6 42.4,6.85 44.35,6.85 v2(44.5,7)
  Bottom w0.2: R137.1@43.7,6.32 43.727,6.347 44.022,6.347 44.5,6.825 v2(44.5,7)
NetLED2_K: LED2.K R142.1 | length 35.5
  Top w0.15: v1(19.15,0.875) 19.52,1.245 LED2.K@19.9,1.245
  L6 w0.1: v1(19.15,0.875) 19.4,1.125 20.55,1.125 21.325,0.35 24.8,0.35 25.25,0.8 26.492,0.8 27.017,0.275 35.358,0.275 37.083,2 38.158,2 38.8,2.642 38.8,4.833 38.625,5.008 38.625,5.91 40.115,7.4 41.567,7.4 42.392,6.575 v2(45.025,6.575)
  Bottom w0.15: R142.1@42.95,6.325 42.975,6.325 43.05,6.25 43.05,6.225 43.3,5.975 44.075,5.975 44.675,6.575 v2(45.025,6.575)
NetMN7_1: MN7.1 MN9.2 | length 1.2
  Top w0.6: MN9.2@35.675,18.475 36.475,18.475 MN7.1@36.75,18.2
NetMN8_1: MN8.1 MN10.2 | length 1.2
  Top w0.6: MN10.2@35.675,21.475 36.475,21.475 MN8.1@36.75,21.75
NetR2_2: R2.2 R3.2 R4.2 | length 0.6
  Bottom w0.15: R2.2@13.815,9.9 14,9.715 ; R3.2@14,9.59 14,9.715 ; R4.2@14.185,9.9 14,9.715
NetR16_2: R16.2 R17.2 R18.2 | length 0.7
  Bottom w0.15: R18.2@15.415,9.975 15.625,9.765 ; R17.2@15.625,9.64 15.625,9.765 ; R16.2@15.835,9.975 15.625,9.765
NetR79_1: R79.1 TP1.1 | length 1.1
  Bottom w0.2: R79.1@19.62,18.51 20,18.89 TP1.1@20,19.45
NetR136_1: R136.1 R140.1 X8.30 | length 4
  Bottom w0.14: X8.30@-2.5,11.85 -2.325,11.675 -2.175,11.825 -1.037,11.825 0.17,13.032 R140.1@0.17,13.75
NetR139_1: R139.1 X8.32 | length 3.1
  Bottom w0.14: X8.32@-2.5,11.05 -0.986,11.05 R139.1@0.145,12.181
NetR141_2: R141.2 X8.37 | length 2.6
  Top w0.35: X8.37@-2.55,9.05 R141.2@0.069,9.05
NetR143_2: R143.2 X8.43 | length 3
  Top w0.14: X8.43@-2.5,6.65 -2.325,6.475 -1.35,6.475 -1.245,6.37 -0.605,6.37 -0.103,6.872 R143.2@0.145,6.872
NetR144_2: R144.2 X8.45 | length 2.8
  Top w0.14: X8.45@-2.5,5.85 -2.325,6.025 -1.35,6.025 -1.245,6.13 0.068,6.13 R144.2@0.145,6.053
NetR147_1: R147.1 XO1.6 | length 6.1
  Top w0.25: XO1.6@3.964,12.885 4.289,12.56 4.289,11.822 7.387,8.725 7.646,8.725 R147.1@7.823,8.548
NetR171_1: R171.1 R172.1 | length 0.7
  Bottom w0.2: R171.1@15.105,22.75 15.487,23.132 15.637,23.132 R172.1@15.65,23.145
PCIE_CLK_IN: R151.2 X8.19 | length 3
  Top w0.18: X8.19@-2.5,16.25 -2.29,16.04 -1.24,16.04 -1.075,15.875 -0.85,15.875 -0.297,15.322 R151.2@0.142,15.322
PCIE_CLK_OUT: IC18.4 R136.2 R154.2 | length 43.5
  L3 w0.1: v1(0.855,12.65) 0.35,13.155 0.35,15.325 1.2,16.175 1.2,16.933 1.525,17.258 1.525,20.15 1.175,20.5 -1.125,20.5 -1.525,20.9 -1.525,23.867 -1.167,24.225 0.008,24.225 0.208,24.025 0.634,24.025 1.125,24.516 1.125,25.006 1.129,25.01 1.129,26.095 2.259,27.225 3.575,27.225 5.25,28.9 7.617,28.9 8.625,27.892 8.625,26.333 10.333,24.625 11,24.625 11.492,24.625 13.342,26.475 15.633,26.475 17.543,24.565 18.16,24.565 v1(18.8,23.925)
  Bottom w0.2: R136.2@0.73,13.1 0.78,13.05 0.78,12.766 0.855,12.691 v1(0.855,12.65)
  Bottom w0.25: 18.8,23.65 v1(18.8,23.925) 18.83,23.955 R154.2@18.83,24.1
PCIE_PER0_N: C114.1 X8.23 | length 11.3
  Top w0.14: X8.23@-2.5,14.65 -2.325,14.475 -1.35,14.475 -1.231,14.355 -0.72,14.355 v1(-0.525,14.55)
  L4 w0.1: v1(-0.525,14.55) -0.35,14.725 0.25,14.725 0.55,15.025 0.55,15.475 1.3,16.225 1.3,16.475 2.504,17.679 2.504,19.554 2.725,19.775 v1(3.1,19.775)
  Bottom w0.1: v1(3.1,19.775) 3.1,19.76 3.425,19.435 3.425,19.22 3.958,18.687 C114.1@4.325,18.687
PCIE_PER0_P: C112.1 X8.25 | length 11.2
  Top w0.14: X8.25@-2.5,13.85 -2.325,14.025 -1.35,14.025 -1.26,14.115 -0.69,14.115 v1(-0.525,13.95)
  L4 w0.1: v1(-0.525,13.95) -0.5,13.925 -0.04,13.925 0.15,14.115 0.15,14.25 0.925,15.025 1.135,15.025 1.325,15.215 1.325,15.425 2.704,16.804 2.704,18.904 v1(3.1,19.3)
  Bottom w0.1: v1(3.1,19.3) 3.148,19.252 3.148,19.215 C112.1@4.325,18.037
  Bottom w0.25: v1(3.1,19.3) v1@3.112,19.312
PCIE_PERST#: D1.C R72.2 R135.2 R208.1 X8.22 | length 53.5
  Top w0.15: v1(0.125,2.176) 0.125,2.925 -0.425,3.475 -0.425,4.5 -0.089,4.836 0.331,4.836 0.617,4.55 0.63,4.55 0.705,4.475 R72.2@0.705,4.45
  Top w0.2: v1(9.075,18.55) 9.25,18.55 D1.C@9.4,18.4
  L6 w0.1: v1(0.125,2.176) 0.125,2.45 -1.775,4.35 -1.775,14.045 v1(-0.97,14.85) -1.625,15.505 -1.625,16.583 -1.083,17.125 -0.325,17.125 0.025,17.475 0.542,17.475 1.175,18.108 1.175,19.9 0.7,20.375 0.7,22.62 0.325,22.995 0.325,23.525 -0.1,23.95 -0.1,24.325 0.425,24.85 0.65,24.85 0.875,25.075 0.875,25.525 1.275,25.925 2,25.925 2.9,25.025 3.625,25.025 4.075,24.575 8.225,24.575 9.075,23.725 10.16,23.725 10.35,23.535 10.35,20.092 9.075,18.817 v1(9.075,18.55)
  Bottom w0.2: X8.22@-2.5,15.05 -1.845,15.05 -1.645,14.85 v1(-0.97,14.85) -0.845,14.85 -0.645,15.05 0.425,15.05 0.729,14.746 R135.2@0.729,14.467 ; v1(0.125,2.176) 1.029,2.176 R208.1@1.4,1.805
PCIE_PET0_N: C123.1 X8.31 | length 3.2
  Top w0.14: X8.31@-2.5,11.45 -2.325,11.275 -1.35,11.275 -1.245,11.17 -0.97,11.17 -0.275,10.475 -0.127,10.475 C123.1@0.145,10.747
PCIE_PET0_P: C116.1 X8.33 | length 3.2
  Top w0.14: X8.33@-2.5,10.65 -2.325,10.825 -1.35,10.825 -1.245,10.93 -1.08,10.93 -0.345,10.195 -0.147,10.195 C116.1@0.145,9.903
PCIE_PPS_IN: R167.1 X8.3 | length 23.3
  Top w0.14: X8.3@-2.5,25.8 v1@0.075,25.8
  L4 w0.1: v1(0.075,25.8) 0.675,25.8 2.15,27.275 4.108,27.275 5.383,28.55 5.85,28.55 6.025,28.375 6.883,28.375 7.233,28.025 7.5,28.025 7.7,28.225 v1(10.925,28.225)
  Bottom w0.15: v1(10.925,28.225) 11.25,27.9 11.25,27.225 10.8,26.775 10.8,25.475 10.55,25.225 10.55,24.726 10.901,24.375 10.904,24.375 11.11,24.169 11.11,24.165 11.275,24 13.92,24 R167.1@14.545,23.375
PCIE_PPS_OUT: R181.1 X8.5 | length 38.7
  Top w0.15: v1(28.7,25.5) 28.733,25.5 28.888,25.345 R181.1@29.35,25.345
  Top w0.18: X8.5@-2.5,25.05 -2.375,24.925 v1@0.1,24.925
  L3 w0.1: v1(0.05,24.95) 0.072,24.95 0.234,24.789 0.625,24.789 0.929,25.092 0.929,26.177 2.176,27.425 3.492,27.425 5.167,29.1 7.7,29.1 8.825,27.975 8.825,26.415 10.065,25.175 10.46,25.175 10.65,25.365 10.65,25.471 11.879,26.7 16.475,26.7 17.675,25.5 19.375,25.5 19.95,26.075 26.315,26.075 26.64,25.75 28.45,25.75 v1(28.7,25.5)
PCIE_REF_CLK_N: C111.1 X8.11 | length 3.2
  Top w0.14: X8.11@-2.5,22.65 -2.325,22.475 -1.35,22.475 -1.245,22.37 -0.81,22.37 0.04,23.22 0.065,23.22 0.145,23.3 C111.1@0.145,23.325
PCIE_REF_CLK_P: C110.1 X8.13 | length 3
  Top w0.14: X8.13@-2.5,21.85 -2.325,22.025 -1.35,22.025 -1.245,22.13 -0.695,22.13 -0.225,22.6 C110.1@0.145,22.6
PCIE_RX1_N: X8.47
PCIE_RX1_P: X8.49
PCIE_TX1_N: X8.39
PCIE_TX1_P: X8.41
PCIE_W_DISABLE2#: IC8.9 R145.1 X8.51 | length 51.3
  Top w0.2: X8.51@-2.5,3.45 -1.55,3.45 -0.825,2.725 v1(-0.825,2.45) v1@-0.825,2.4
  L4 w0.1: v1(-0.825,2.45) -2.675,4.3 -2.675,16.758 -1.758,17.675 0.5,17.675 1.1,18.275 1.1,19.675 0.675,20.1 -1.449,20.1 -2.175,20.826 -2.175,25.975 -1.008,27.142 v1(0.134,27.142) 1.318,28.325 4.592,28.325 5.267,29 12.925,29 13.425,28.5 v1(14.75,28.5)
  Bottom w0.2: R145.1@0.134,26.858 R145.1@0.183,26.81 ; v1(0.134,27.142) v1@0.134,27.167 ; IC8.9@14.75,28.075 v1@14.75,28.55
  Bottom w0.25: R145.1@0.134,26.858 v1(0.134,27.142)
PCIE_W_DISABLE2#_LS: IC8.4 R76.1 | length 1.3
  Bottom w0.1: IC8.4@14.75,26.525 14.75,26.275 14.925,26.1 R76.1@14.925,25.33
R1_N: C123.2 IC6.R2 | length 20.6
  Top w0.25: v1(0.605,10.422) 0.705,10.522 C123.2@0.705,10.747
  L4 w0.1: v1(0.605,10.422) 0,11.027 0,13.042 0.858,13.9 1.209,13.9 1.775,14.466 1.775,14.753 2.075,15.053 2.075,15.609 3.104,16.638 3.104,16.962 3.45,17.308 3.45,18.267 3.25,18.467 3.25,18.475 v1@3.1,18.625
  Bottom w0.1: v1@3.125,18.6 4.2,17.525 5.325,17.525 6.038,16.812 8.822,16.812 9.609,17.6 10.058,17.6 10.808,18.35 IC6.R2@11.751,18.35
  other v1: 3.1,18.6
R1_P: C116.2 IC6.P2 | length 20.7
  Top w0.25: v1(0.605,9.678) 0.705,9.778 C116.2@0.705,9.903
  L4 w0.1: v1(0.605,9.678) -0.2,10.483 -0.2,13.125 0.425,13.75 0.425,14.04 1.06,14.675 1.414,14.675 1.875,15.136 1.875,15.692 2.904,16.721 2.904,17.045 3.1,17.241 v1(3.1,18.15)
  Bottom w0.1: v1(3.1,18.15) 3.925,17.325 5.242,17.325 5.955,16.612 8.905,16.612 9.692,17.4 10.14,17.4 10.89,18.15 11.451,18.15 IC6.P2@11.751,17.85
RF_I2C_SCL: R132.1 X7.3 | length 0.9
  Bottom w0.15: X7.3@3.575,26.35 3.575,25.63 R132.1@3.675,25.53
RF_I2C_SDA: R133.1 X7.5 | length 0.9
  Bottom w0.15: R133.1@4.5,25.53 4.575,25.605 X7.5@4.575,26.35
RX1_H: IC3.2 T5.1 | length 12.5
  Top w0.18: T5.1@41.65,16.825 44.025,16.825 cw(c44.025,15.525) 45.325,15.525 45.325,9.668 cw(c44.307,9.668) 44.307,8.65 IC3.2@43.702,8.65
RX1_H_A_N: IC1.AJ15 MN27.1 MN29.2 | length 12.8
  Top w0.1: v1(29.932,11.016) cw(c30.015,10.934) 30.015,11.05 ccw(c30.015,11.396) 30.26,11.151 cw(c30.618,10.793) 30.618,11.3 30.849,11.3 cw(c30.849,10.676) 31.291,11.117 ; 31.291,11.116 ccw(c31.633,11.458) 31.633,10.975 34.375,10.975 ccw(c34.375,11.397) 34.674,11.099 34.9,11.325 ccw(c34.538,11.687) 35.05,11.687 35.05,15.365 cw(c35.756,15.365) 35.257,15.865 35.259,15.866 35.38,15.988 ; 35.436,16.044 35.38,15.988 cw(c35.834,15.531) 35.834,16.175 ; 35.835,16.175 ccw(c35.835,16.81) 36.284,16.361 MN27.1@36.473,16.55 ; MN27.1@36.498,16.575 MN27.1@36.473,16.55 ; MN29.2@37.548,16.575 37.255,16.282 cw(c36.997,16.54) 36.998,16.175 cw(c36.999,16.54) 36.741,16.282 MN27.1@36.473,16.55
RX1_H_A_P: IC1.AK14 MN23.2 MN27.2 | length 12.6
  Top w0.1: v1(30.265,10.683) ccw(c30.183,10.765) 30.3,10.765 30.3,10.773 cw(c30.626,10.773) 30.395,11.004 cw(c30.626,10.773) 30.626,11.1 30.848,11.1 cw(c30.848,10.673) 31.151,10.974 ccw(c31.632,11.456) 31.632,10.775 34.377,10.775 ccw(c34.377,11.394) 34.814,10.956 35.041,11.184 ccw(c34.538,11.687) 35.043,11.185 ccw(c34.538,11.687) 35.25,11.687 35.25,15.363 cw(c35.762,15.363) 35.4,15.725 35.519,15.844 cw(c35.835,15.528) 35.835,15.975 cw(c35.835,15.34) 36.284,15.789 MN27.2@36.473,15.6 ; MN27.2@36.498,15.575 MN27.2@36.473,15.6 ; MN23.2@37.548,15.575 37.255,15.868 ccw(c36.997,15.61) 36.998,15.975 ccw(c36.999,15.61) 36.741,15.868 MN27.2@36.473,15.6
RX1_H_B_N: MN25.1 MN29.1 T5.3 | length 2.6
  Top w0.1: MN29.1@38.548,16.575 38.841,16.282 ccw(c39.099,16.54) 39.099,16.175 ; 39.097,16.175 ccw(c39.097,16.54) 39.355,16.282 MN25.1@39.623,16.55 ; MN25.1@39.598,16.575 cw(c39.848,16.575) 39.848,16.825 T5.3@40.65,16.825
RX1_H_B_P: MN23.1 MN25.2 T5.4 | length 2.5
  Top w0.1: MN23.1@38.548,15.575 38.841,15.868 cw(c39.099,15.61) 39.098,15.975 cw(c39.097,15.61) 39.355,15.868 MN25.2@39.601,15.622 ; MN25.2@39.598,15.575 cw(c39.998,15.575) MN25.2@39.601,15.622 ; MN25.2@39.623,15.6 MN25.2@39.601,15.622 ; MN25.2@39.726,15.622 cw(c40.123,15.575) 40.123,15.975 T5.4@40.65,15.975
RX1_L: IC3.9 T3.2 | length 6.3
  Top w0.18: v1(41,6.725) ccw(c40.155,7.57) 41.35,7.57 41.35,8.9 cw(c41.55,8.9) 41.55,9.1 IC3.9@41.797,9.1
  Bottom w0.18: T3.2@38.875,5.26 39.211,4.924 ccw(c39.45,5.163) 39.45,4.825 39.775,4.825 ccw(c39.775,5.15) 40.1,5.15 40.1,5.513 cw(c40.854,5.513) 40.321,6.046 v1(41,6.725)
RX1_L_A_N: IC1.AM12 MN19.1 MN21.2 | length 7.7
  Bottom w0.1: IC1.AM12@30.932,10.017 ccw(c31.014,9.935) 30.897,9.935 cw(c30.551,9.935) 30.796,9.69 ccw(c31.137,9.349) 30.655,9.349 30.655,8.868 ccw(c31.817,8.868) 30.995,8.047 ; 31.021,8.021 33.101,5.941 33.243,5.8 ccw(c33.595,6.152) 33.595,5.653 33.596,5.653 cw(c33.596,5.289) 33.854,5.547 MN19.1@34.122,5.279 ; MN19.1@34.147,5.253 MN19.1@34.122,5.279 ; MN21.2@35.197,5.253 34.904,5.547 ccw(c34.647,5.289) 34.647,5.653 ccw(c34.648,5.289) 34.391,5.547 MN19.1@34.122,5.279
RX1_L_A_P: IC1.AN11 MN16.2 MN19.2 | length 7.3
  Bottom w0.1: IC1.AN11@31.265,9.684 cw(c31.182,9.766) 31.182,9.65 31.172,9.65 ccw(c31.172,9.328) 30.944,9.556 ccw(c31.16,9.34) 30.855,9.34 30.855,8.905 ccw(c31.905,8.905) 31.162,8.163 31.221,8.104 33.301,6.024 33.383,5.942 ccw(c33.596,6.155) 33.596,5.854 ccw(c33.596,6.218) 33.854,5.96 34.122,6.228 34.391,5.96 ccw(c34.648,6.218) 34.647,5.854 ccw(c34.647,6.218) 34.904,5.96 MN16.2@35.197,6.253
RX1_L_B_N: MN17.1 MN21.1 T3.3 | length 2.7
  Bottom w0.1: MN21.1@36.197,5.253 36.491,5.547 cw(c36.748,5.289) 36.748,5.653 ; 36.747,5.653 cw(c36.747,5.289) 37.004,5.547 MN17.1@37.272,5.279 ; MN17.1@37.223,5.279 37.491,5.547 cw(c37.748,5.289) 37.748,5.653 cw(c37.748,5.436) 37.902,5.59 T3.3@38.225,5.267
RX1_L_B_P: MN16.1 MN17.2 T3.4 | length 2.7
  Bottom w0.1: MN16.1@36.197,6.253 36.491,5.96 ccw(c36.748,6.218) 36.747,5.854 ccw(c36.747,6.218) 37.004,5.96 MN17.2@37.272,6.228 ; MN17.2@37.223,6.228 37.247,6.204 37.491,5.96 ccw(c37.748,6.218) 37.748,5.854 ccw(c37.748,6.071) 37.902,5.917 T3.4@38.225,6.24
RX1_W: IC3.3 T8.1 | length 5
  Top w0.18: T8.1@40.04,10.67 T8.1@40.305,10.67 ; T8.1@40.33,10.695 v1(41.05,9.975) ; IC3.3@43.702,9.1 v1(44.075,9.1)
  L6 w0.1: v1@41.025,9.95 ccw(c41.085,9.95) 41.043,9.907 41.25,9.7 ccw(c41.612,10.062) 41.612,9.55 43.039,9.55 cw(c43.039,9.1) 43.357,9.418 43.392,9.383 ccw(c44.075,10.066) v1(44.075,9.1)